# Altium PCB PCB1.PcbDoc
Units mm, origin at the board's own origin, x right, y up, seen from the top; angles counter-clockwise.
Board outline 56.95 x 49.39 mm, 2 copper layers (Top Layer, Bottom Layer); 56 components, 29 nets, 159 pads, 61 vias.
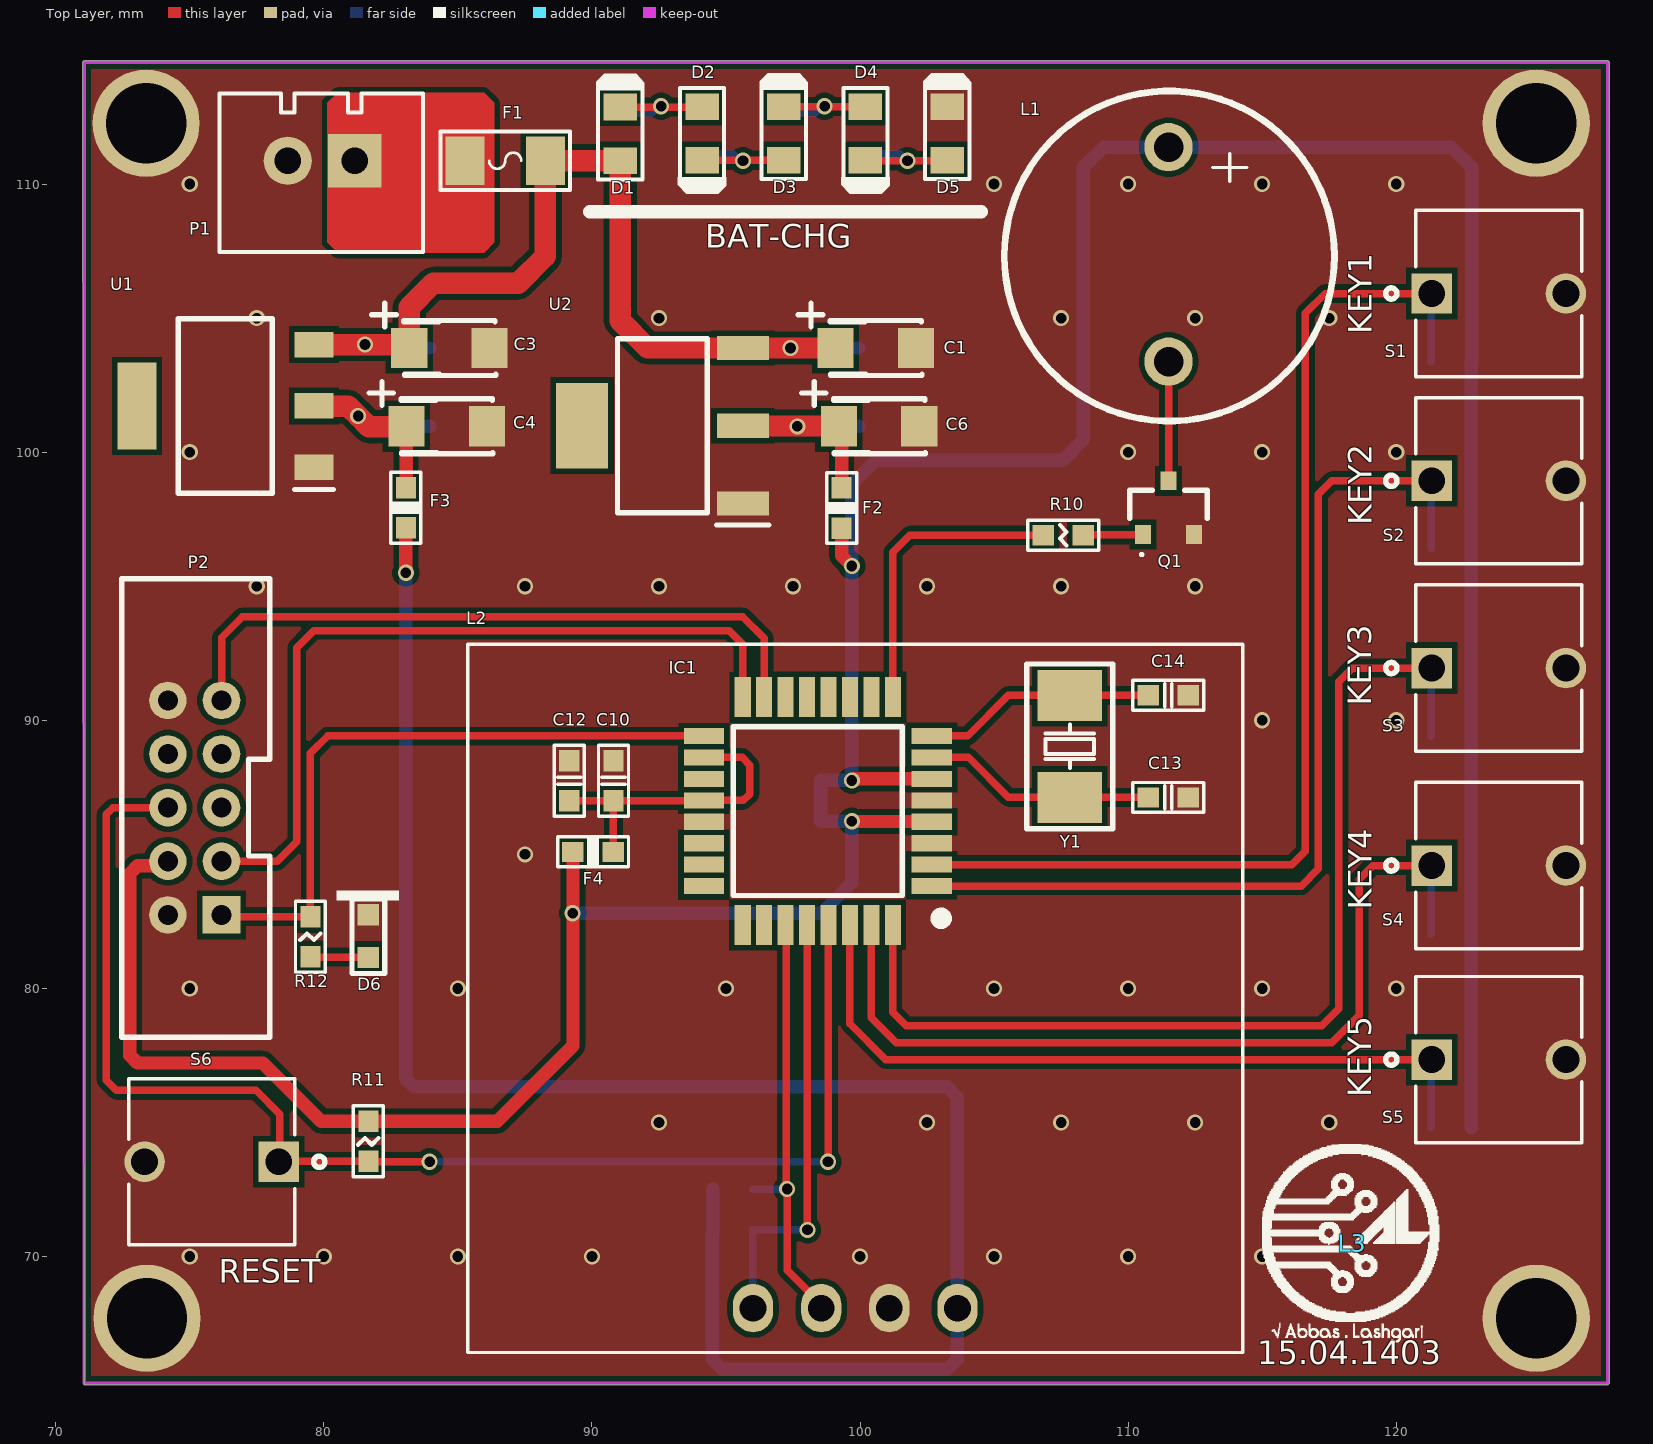
[diagram p0: Top Layer view]
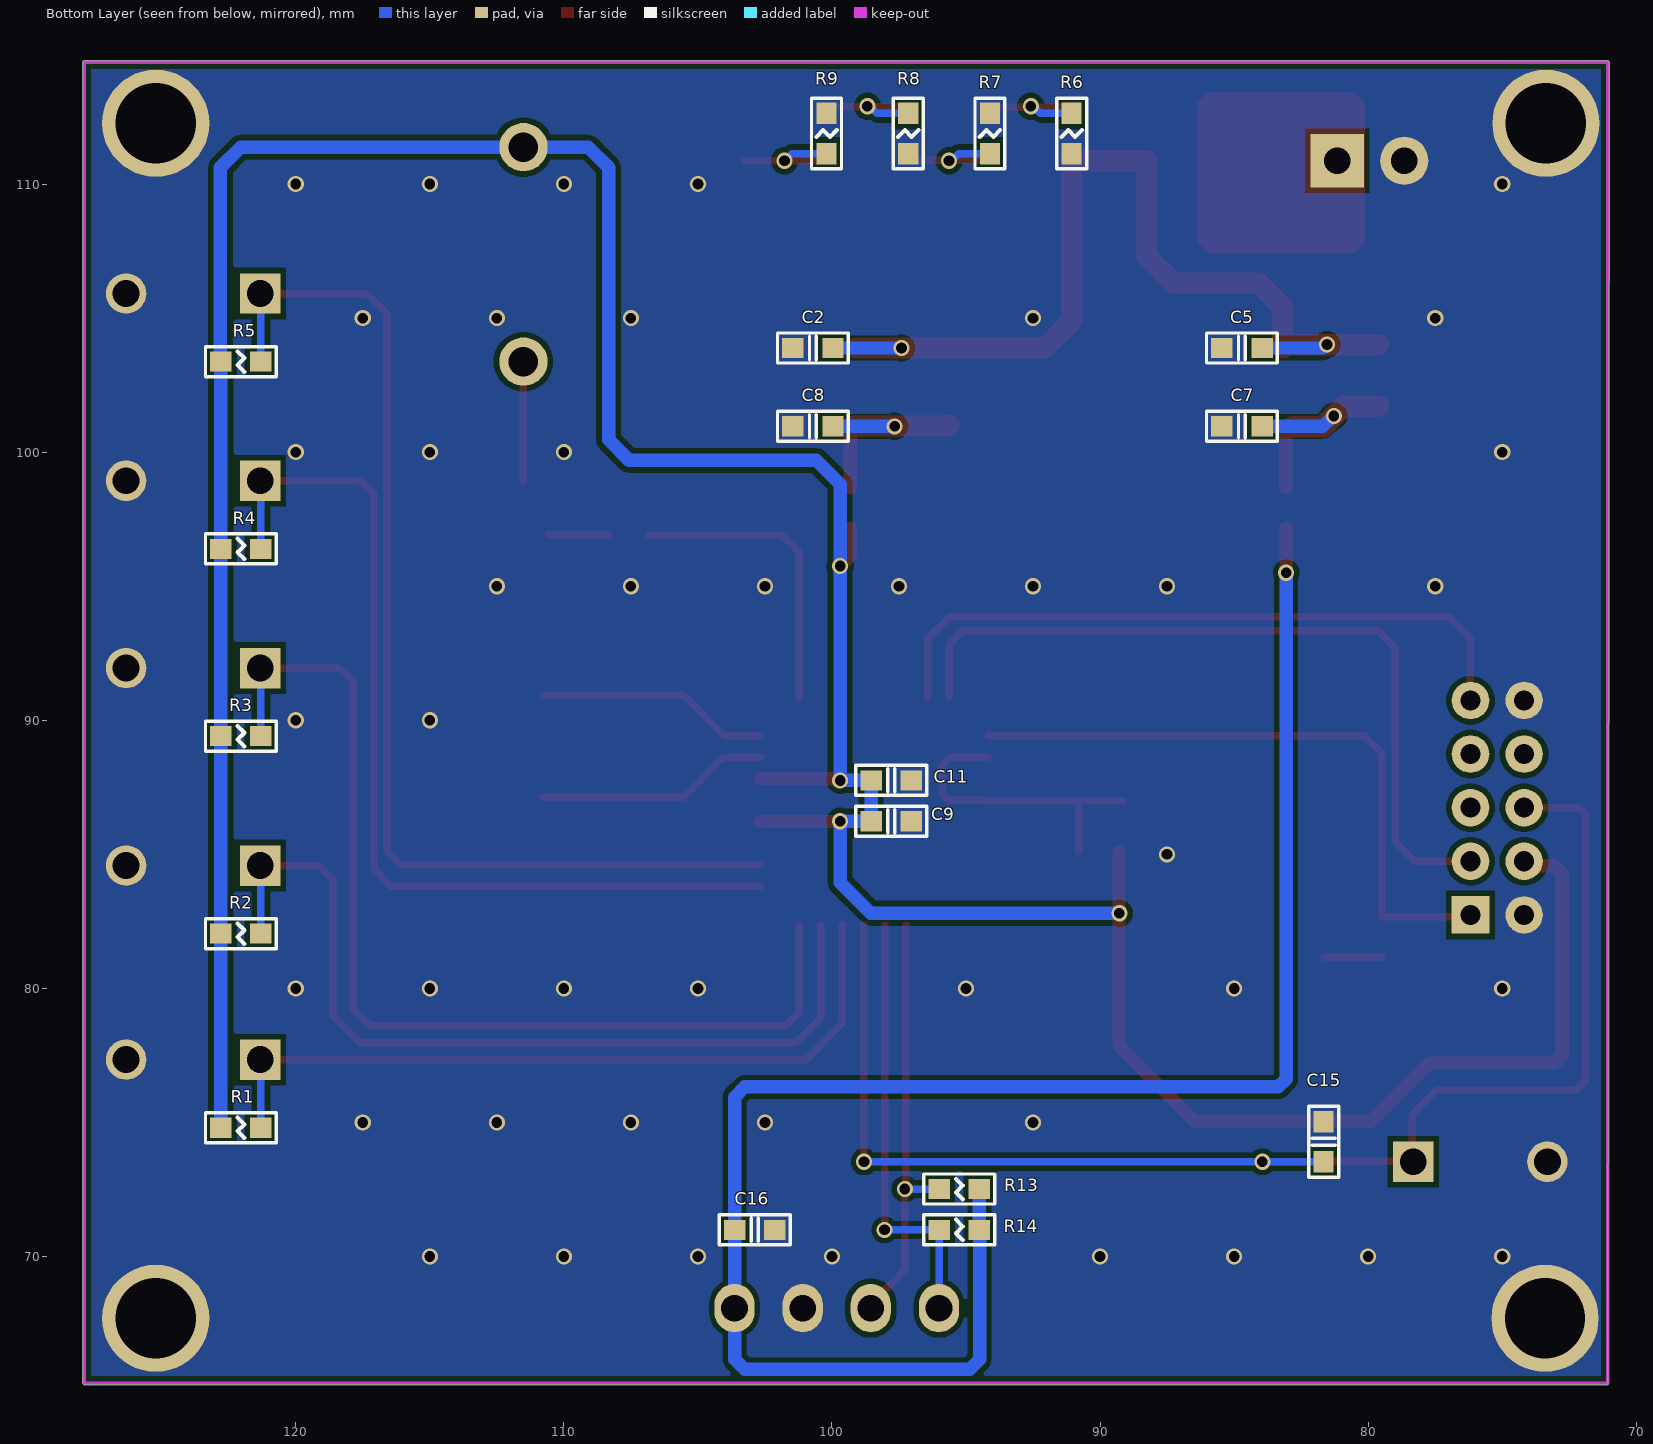
[diagram p1: Bottom Layer view, seen from below]
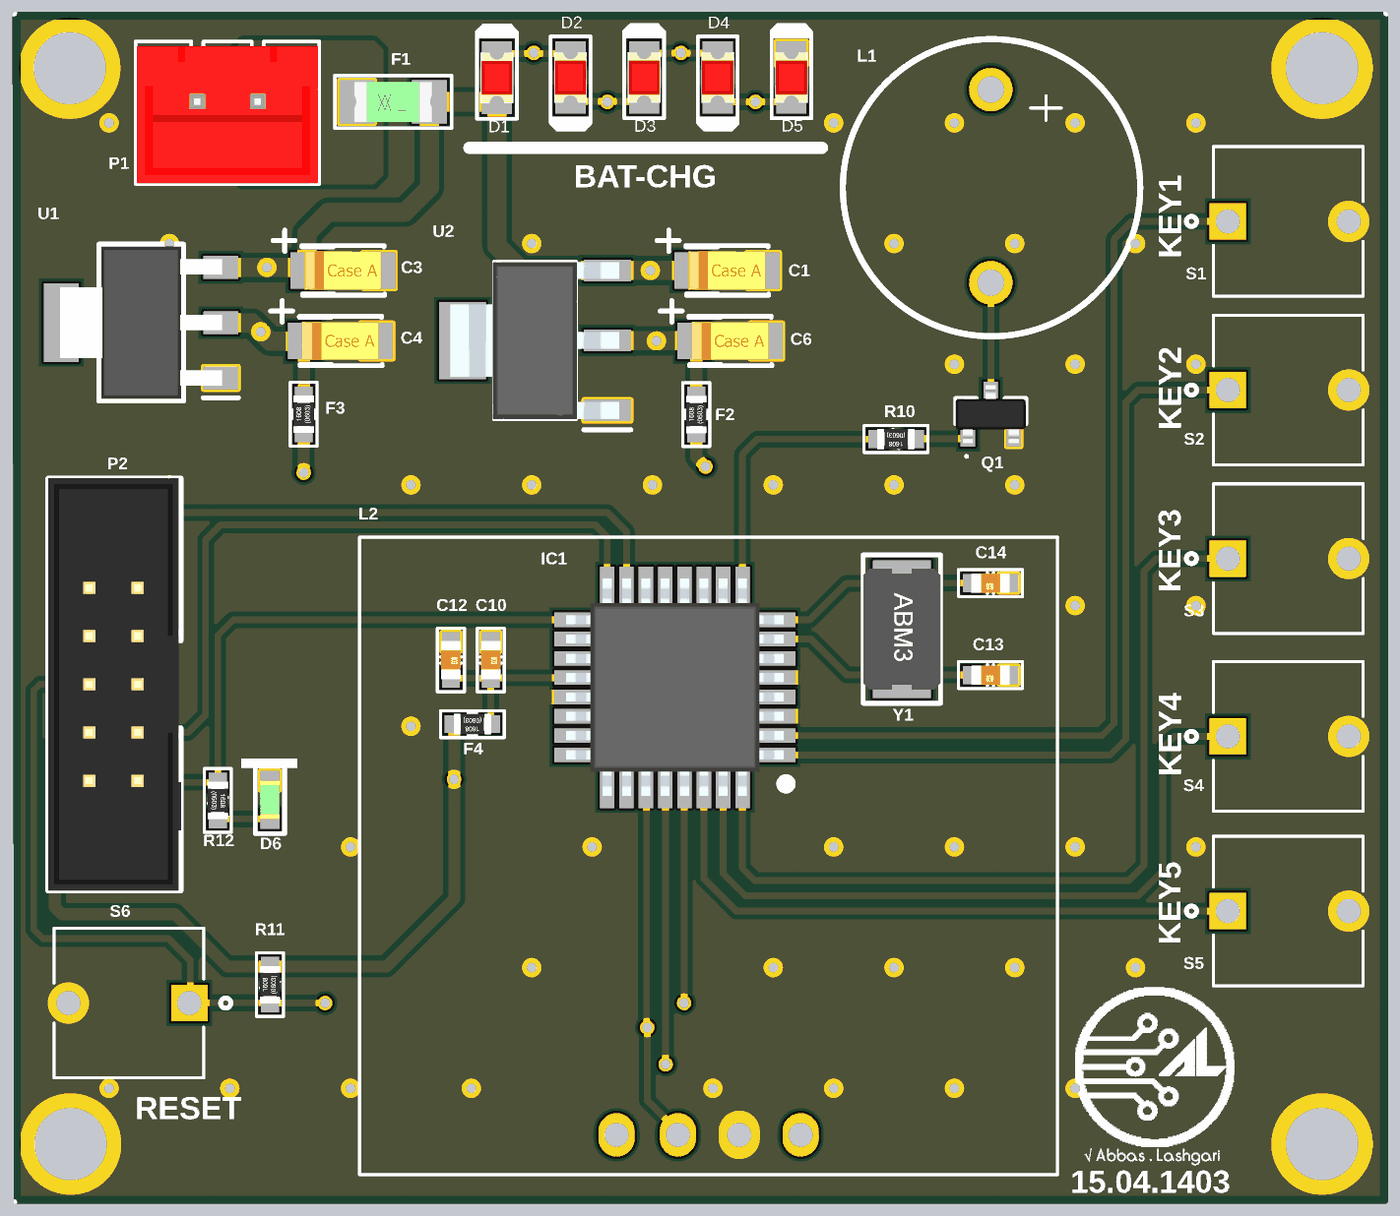
[diagram p2: 3D render of the assembled board from above, using the file's embedded part models]
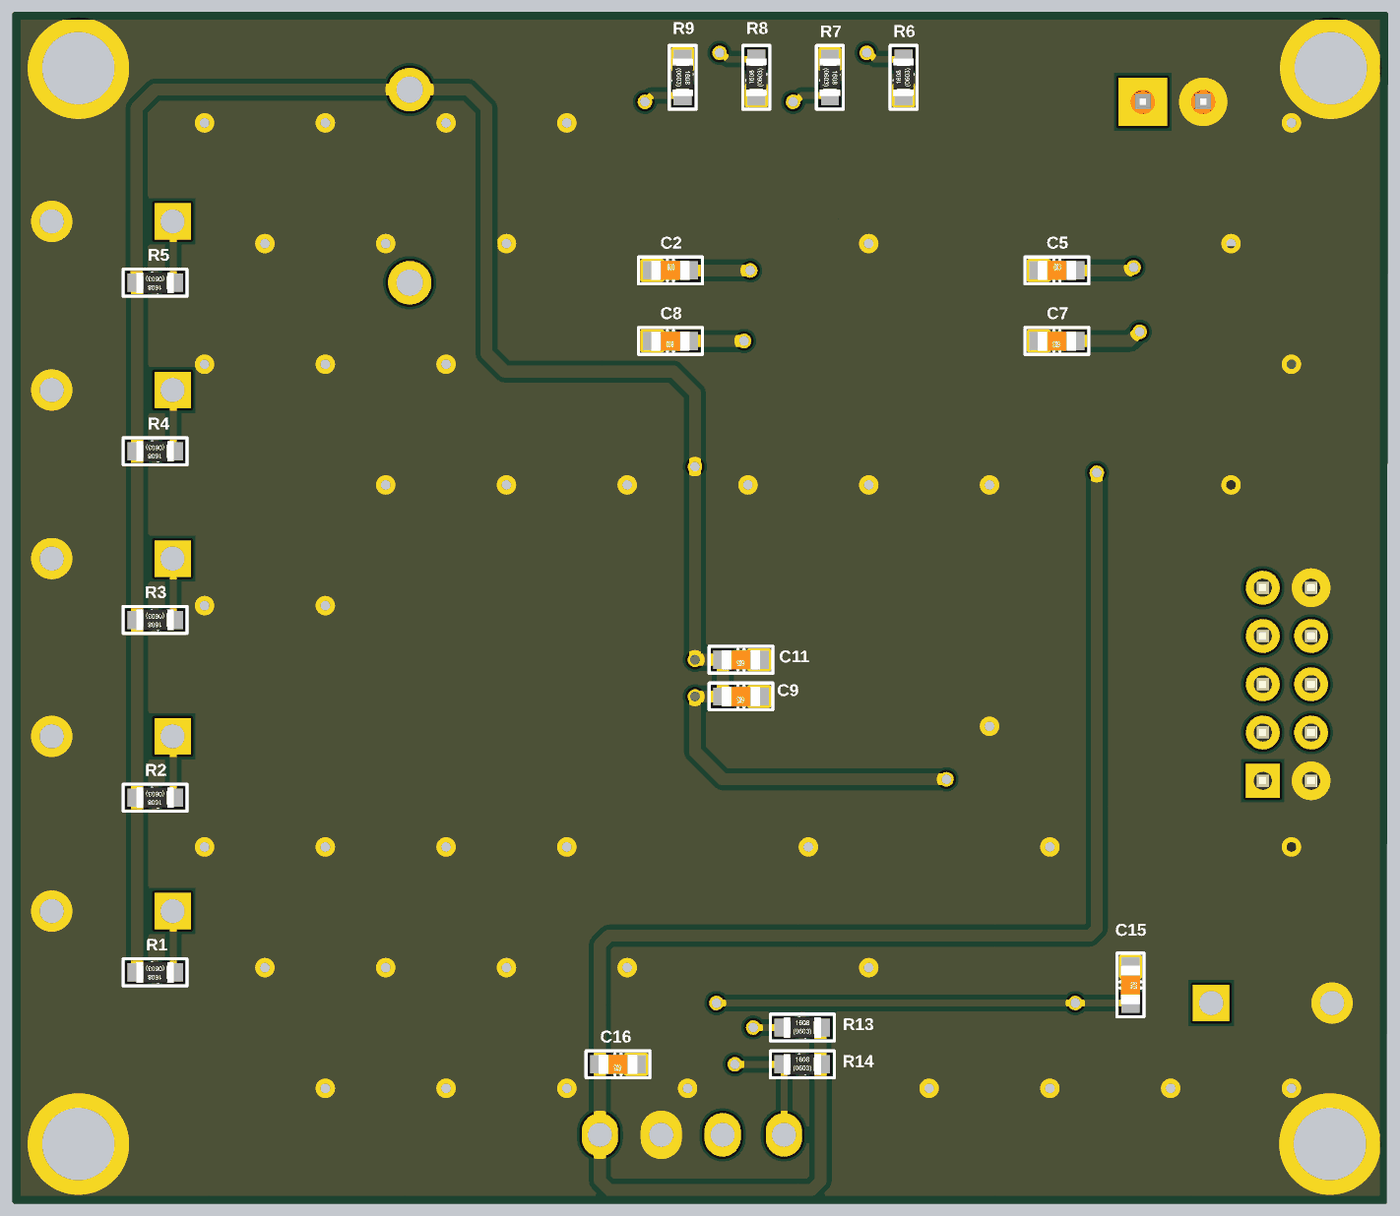
[diagram p3: 3D render of the assembled board from below, using the file's embedded part models]

## Layer stack, top to bottom
Top Solder: solder mask 0.0102, Solder Resist, Dk 3.5
Top Layer: signal copper 0.0356
Dielectric 1: dielectric 0.32, FR-4, Dk 4.8
Bottom Layer: signal copper 0.0356
Bottom Solder: solder mask 0.0102, Solder Resist, Dk 3.5

## Board outline
71.064,65.214 127.889,65.214 127.953,65.278 127.953,114.544 127.889,114.608 71.064,114.608 71,114.544

## Design rules (kind name [scope] priority, off if disabled: settings)
Clearance [All] p1: gap=0.2 ignorepadtopadclearanceinfootprint=FALSE
HoleSize [All] p1: absolutevalues=TRUE maxlimit=4 minlimit=0.025 maxpercent=80.000 minpercent=20.000
MinimumSolderMaskSliver [All] p1: minsoldermaskwidth=0.1
PolygonConnect [All] p1: connectstyle=Direct reliefconductorwidth=0.254 reliefentries=4 polygonreliefangle="90 Angle" airgapwidth=0.254
RoutingVias [All] p1: holewidth=0.3 width=0.5 viastyle="Through Hole" minholewidth=0.3 minwidth=0.5 maxholewidth=0.4 maxwidth=0.6
SilkToSilkClearance [All] p1: silktosilkclearance=0.1
SilkToSolderMaskClearance [IsPad] p1: minsilkscreentomaskgap=0 clearancetoexposedcopper=TRUE
SolderMaskExpansion [All] p1: expansion=0.102 istentingtop=FALSE
Width POW_Width [InNet('3V3') OR InNet('5V0')] p1: maxlimit=1.5 minlimit=0.5 preferedwidth=1
Width [All] p2: maxlimit=0.8 minlimit=0.28 preferedwidth=0.5
26 further rules are at their usual default settings.

## Components (designator, comment, footprint, x,y, rotation, side; value= is the part's Value field where it differs from the comment)
C1 "Cap Pol1" Tan-A 100.584,103.886 r0 top value=10uF
C2 "Cap" 603C 100.711,103.886 r180 bottom value=100nF
C3 "Cap Pol1" Tan-A 84.685,103.886 r0 top value=10uF
C4 "Cap Pol1" Tan-A 84.582,100.965 r0 top value=10uF
C5 "Cap" 603C 84.709,103.886 r180 bottom value=100nF
C6 "Cap Pol1" Tan-A 100.711,100.965 r0 top value=10uF
C7 "Cap" 603C 84.709,100.965 r0 bottom value=100nF
C8 "Cap" 603C 100.711,100.965 r0 bottom value=100nF
C9 "Cap" 603C 97.79,86.233 r0 bottom value=100nF
C10 "Cap" 603C 90.805,87.745 r270 top value=10nF
C11 "Cap" 603C 97.79,87.757 r0 bottom value=100nF
C12 "Cap" 603C 89.154,87.745 r270 top value=1uF
C13 "Cap" 603C 111.494,87.122 r180 top value=18pF
C14 "Cap" 603C 111.494,90.932 r180 top value=18pF
C15 "Cap" 603C 81.661,74.283 r270 bottom value=100pF
C16 "Cap" 603C 102.882,70.993 r0 bottom value=100nF
D1 "LED0" "LED 0805" 91.059,111.871 r90 top
D2 "LED0" "LED 0805" 94.107,111.887 r270 top
D3 "LED0" "LED 0805" 97.155,111.887 r90 top
D4 "LED0" "LED 0805" 100.203,111.887 r270 top
D5 "LED0" "LED 0805" 103.251,111.887 r90 top
D6 "LED0" "LED 0603" 81.661,81.953 r90 top
F1 "Fuse 1" "Fuse 1206" 86.765,110.871 r0 top
F2 "Ferrit" 603FB 99.314,97.917 r90 top value=1K
F3 "Ferrit" 603FB 83.058,97.929 r90 top value=1K
F4 "Ferrit" 603FB 90.043,85.09 r180 top value=1K
IC1 "ATmega328P-_15AZ" ATMEGA328P-15AZ 98.425,86.614 r180 top
L1 "KPEG-204A" KPEG204A 111.506,111.379 r0 top
L2 "OLED0.96" OLED0.96 99.822,81.534 r180 top
L3 "Logo" "Logo Abbas Lashgari" 118.364,70.485 r0 top
P1 "Battery" XH-B2B 79.903,110.871 r180 top
P2 "Progremmer" IDC-2*5 75.184,86.741 r90 top
Q1 "BC817" BC817 111.506,97.933 r0 top
R1 "Res1" 603R 122.047,74.803 r0 bottom value=10K
R2 "Res1" 603R 122.047,82.042 r0 bottom value=10K
R3 "Res1" 603R 122.047,89.408 r0 bottom value=10K
R4 "Res1" 603R 122.047,96.393 r0 bottom value=10K
R5 "Res1" 603R 122.047,103.378 r0 bottom value=10K
R6 "Res1" 603R 91.059,111.887 r90 bottom value=10K
R7 "Res1" 603R 94.107,111.887 r270 bottom value=10K
R8 "Res1" 603R 97.155,111.887 r90 bottom value=10K
R9 "Res1" 603R 100.203,111.887 r270 bottom value=10K
R10 "Res1" 603R 107.581,96.901 r180 top value=1K
R11 "Res1" 603R 81.661,74.295 r90 top value=10K
R12 "Res1" 603R 79.502,81.927 r270 top value=10K
R13 "Res1" 603R 95.25,72.517 r180 bottom value=10K
R14 "Res1" 603R 95.25,70.993 r180 bottom value=10K
S1 "SW-PB" SW_2pin 123.825,106.045 r0 top
S2 "SW-PB" SW_2pin 123.825,99.06 r0 top
S3 "SW-PB" SW_2pin 123.825,92.075 r0 top
S4 "SW-PB" SW_2pin 123.825,84.709 r0 top
S5 "SW-PB" SW_2pin 123.825,77.47 r0 top
S6 "SW-PB" SW_2pin 75.819,73.406 r180 top
U1 "AMS1117-3.3" AMS1117-3.3 76.329,101.723 r180 top
U2 "AMS1117-5.0" AMS1117-5.0 92.631,100.986 r180 top
Y1 "8MHz" ABM3 107.823,89.027 r270 top

## Footprints (in the part's own frame and the unit in brackets; to place one, negate y for a bottom-side part, rotate by r counter-clockwise, add the part's x,y. Pads: shape width x height; smd on the part's side, far side on the other; paste and mask are expansions set on the pad)
603C [mm] "1.6 mm × 0.8 mm"
  rect 0.8x0.75 smd: 1(-0.75,0) 2(0.75,0)
  silkscreen extent -1.32,-0.56 1.32,0.56, body extent -0.8,-0.4 0.8,0.4, height 0.3
603FB [mm]
  rect 0.8x0.75 smd: 1(-0.75,0) 2(0.75,0)
  silkscreen extent -1.32,-0.56 1.32,0.56, body extent -0.77,-0.42 0.78,0.43, height 0.45
603R [mm] "1.6 mm × 0.8 mm"
  rect 0.8x0.75 smd: 1(-0.75,0) 2(0.75,0)
  silkscreen extent -1.32,-0.56 1.32,0.56, body extent -0.77,-0.42 0.78,0.43, height 0.45
ABM3 [mm]
  rect 1.9x2.4 smd: 1(-1.9,0) 2(1.9,0)
  silkscreen extent -3.07,-1.6 3.07,1.6, body extent -2.5,-1.6 2.5,1.6, height 1.3
AMS1117-3.3 [mm] "LDO Voltage Regulators 3.3V"
  rect 1.45x0.95 smd: 1(-3.3,2.29) 2(-3.3,0) 3(-3.3,-2.29)
  rect 1.45x3.25 smd: 4(3.3,0)
  silkscreen extent -4.03,-3.25 1.75,3.25, body extent -3.35,-3.15 3.35,3.15, height 1.8
AMS1117-5.0 [mm] "LDO Voltage Regulators 5.0V"
  rect 1.95x0.9 smd: 1(-3,2.9) 2(-3,0) 3(-3,-2.9)
  rect 1.95x3.2 smd: 4(3,0)
  silkscreen extent -3.98,-3.25 1.68,3.7, body extent -3.5,-3.25 3.5,3.25, height 1.8
ATMEGA328P-15AZ [mm] "AVR AVR® ATmega Microcontroller IC 8-Bit 16MHz 32KB (16K x 16) FLASH 32-TQFP (7x7)"
  rect 1.5x0.6 smd: 1(-4.25,2.8) 2(-4.25,2) 3(-4.25,1.2) 4(-4.25,0.4) 5(-4.25,-0.4) 6(-4.25,-1.2) 7(-4.25,-2) 8(-4.25,-2.8) 17(4.25,-2.8) 18(4.25,-2) 19(4.25,-1.2) 20(4.25,-0.4) 21(4.25,0.4) 22(4.25,1.2) 23(4.25,2) 24(4.25,2.8)
  rect 0.6x1.5 smd: 9(-2.8,-4.25) 10(-2,-4.25) 11(-1.2,-4.25) 12(-0.4,-4.25) 13(0.4,-4.25) 14(1.2,-4.25) 15(2,-4.25) 16(2.8,-4.25) 25(2.8,4.25) 26(2,4.25) 27(1.2,4.25) 28(0.4,4.25) 29(-0.4,4.25) 30(-1.2,4.25) 31(-2,4.25) 32(-2.8,4.25)
  silkscreen extent -4.8,-3.15 3.15,4.2, body extent -4.5,-4.5 4.5,4.5, height 1.2
BC817 [mm] "45 V, 500 mA NPN general-purpose transistors"
  rect 0.6x0.7 smd: 1(-0.95,-1) 2(0.95,-1) 3(0,1)
  silkscreen extent -1.45,-1.8 1.45,0.65, body extent -1.45,-1.2 1.45,1.2, height 0.95
"Fuse 1206" [mm] "Body 3.2mm x 1.6mm"
  rect 1.45x1.8 smd: 1(-1.5,0) 2(1.5,0)
  silkscreen extent -2.41,-1.09 2.41,1.09, body extent -1.6,-0.83 1.6,0.83, height 0.56
IDC-2*5 [mm] "10 Pin IDC, 2.0mm Pitch"
  rect 1.4x1.4 hole 0.75: 1(-4,-1)
  round 1.4 hole 0.75: 2(-4,1) 3(-2,-1) 4(-2,1) 5(0,-1) 6(0,1) 7(2,-1) 8(2,1) 9(4,-1) 10(4,1)
  silkscreen extent -8.56,-2.79 8.53,2.72, body extent -8.55,-2.8 8.55,2.7, height 5.6
KPEG204A [mm]
  round 1.8 hole 1.1: 1(0,0) 2(0,-8.001)
  silkscreen extent -6.13,-10.22 6.19,2.09, body extent -6,-10.06 6,1.94, height 9.5
"LED 0603" [mm]
  rect 0.8x0.8 smd: 1(-0.8,0) 2(0.8,0)
  silkscreen extent -1.4,-1.14 1.7,1.19, body extent -0.8,-0.4 0.8,0.4, height 0.85
"LED 0805" [mm] "Body 1.25mm x 2mm"
  rect 1x1.25 smd: 1(-1,0) 2(1,0)
  silkscreen extent -1.7,-0.9 2.24,0.9, body extent -1.05,-0.67 1.05,0.68, height 0.9
"Logo Abbas Lashgari" [mm] "Logo"
  silkscreen extent -3.36,-3.67 3.23,3.7
OLED0.96 [mm] "OLED 0.96 I2C"
  oval 1.5x1.8 hole 1: 1(-3.81,13.462) 2(-1.27,13.462) 3(3.81,13.462) 4(1.27,13.462)
  silkscreen extent -14.45,-11.3 14.45,15.11, body extent -14.35,-11.18 14.35,14.99, height 2.8
SW_2pin [mil] "Push Button 2pin Dip"
  rect 59.37x59.37 hole 39.37: 1(-98.5,-5)
  round 59.37 hole 39.37: 2(98.5,-5)
  silkscreen extent -166,-127 122,117, body extent -112,-125 113,115, height 142
Tan-A [mm] "Tantalium Size A - 3.2mm x 1.6mm"
  rect 1.35x1.5 smd: 1(-1.5,0) 2(1.5,0)
  silkscreen extent -2.9,-1.03 1.73,1.67, body extent -1.6,-0.8 1.6,0.8, height 1.6
XH-B2B [mm] "2 Pin XH Male Connector, 2.5mm Pitch"
  rect 2x2 hole 1: 1(-1.25,0)
  round 1.8 hole 1: 2(1.25,0)
  silkscreen extent -3.8,-2.5 3.8,3.4, body extent -3.75,-2.31 3.75,3.39, height 7

## Part data
C1 C3 C4 C6: "Polarized Capacitor (Radial)", LatestRevisionDate=17-Jul-2002, LatestRevisionNote="Re-released for DXP Platform.", PackageDescription="Polarized Capacitor (Radial); 2 Leads", PackageReference=RB7.6-15, Published=8-Jun-2000, Publisher="Altium Limited"
C2 C5 C7 C8 C9 C10 C11 C12 C13 C14 C15 C16: "Capacitor", LatestRevisionDate=17-Jul-2002, LatestRevisionNote="Re-released for DXP Platform.", PackageDescription="Radial Cap, Thru-Hole; 2 Leads; 0.3 in Pin Spacing", PackageReference=RAD-0.3, Published=8-Jun-2000, Publisher="Altium Limited"
D1 D2 D3 D4 D5 D6: "Typical INFRARED GaAs LED", LatestRevisionDate=08-Jul-2005, LatestRevisionNote="Mech Layer 1 removed.", PackageDescription="LED; 2 Leads", PackageReference=LED-0, Published=8-Jun-2000, Publisher="Altium Limited"
F1: "Fuse", LatestRevisionDate=17-Jul-2002, LatestRevisionNote="Re-released for DXP Platform.", PackageDescription="Thru-Hole; 2 Leads", PackageReference=PIN-W2/E2.8, Published=8-Jun-2000, Publisher="Altium Limited"
F2 F3 F4: library part Res2, "Resistor", LatestRevisionDate=17-Jul-2002, LatestRevisionNote="Re-released for DXP Platform.", PackageDescription="Axial Device, Thru-Hole; 2 Leads; 0.4 in Pin Spacing", PackageReference=AXIAL-0.4, Published=8-Jun-2000, Publisher="Altium Limited"
IC1: library part ATmega328P_15AZ, "AVR AVR® ATmega Microcontroller IC 8-Bit 16MHz 32KB (16K x 16) FLASH 32-TQFP (7x7)", Manufacturer_Name=Microchip, Manufacturer_Part_Number="ATmega328P- 15AZ", Mouser Part Number=N/A, Datasheet Link=https://ww1.microchip.com/downloads/en/DeviceDoc/Atmel-7810-Automotive-Microcontrollers-ATmega328P_Datasheet.pdf, Height=1.2mm, Mouser Price/Stock=https://www.mouser.com/Search/Refine.aspx?Keyword=N%2FA
L1: "Piezo Buzzers & Audio Indicators buzzer, 12 mm x 9.5 mm deep, M, 5 V, 85 dB, Through Hole, Audio Indicator", Manufacturer_Name=KINGSTATE, Datasheet Link=http://www.farnell.com/datasheets/16476.pdf, Height=16.5mm, Manufacturer_Part_Number=KPEG-204A
L2: "OLED 0.96 I2C"
L3: "Abbas Lashgari Logo"
P1: library part "Header 2", "Header, 2-Pin", LatestRevisionDate=17-Jul-2002, LatestRevisionNote="Re-released for DXP Platform.", Publisher="Altium Limited"
P2: library part "Header 5X2", "Header, 5-Pin, Dual row", LatestRevisionDate=17-Jul-2002, LatestRevisionNote="Re-released for DXP Platform.", Publisher="Altium Limited"
Q1: "45 V, 500 mA NPN general-purpose transistors"
R1 R2 R3 R4 R5 R6 R7 R8 R9 R10 R11 R12 R13 R14: "Resistor", LatestRevisionDate=17-Jul-2002, LatestRevisionNote="Re-released for DXP Platform.", PackageDescription="Axial Device, Thru-Hole; 2 Leads; 0.3 in Pin Spacing", PackageReference=AXIAL-0.3, Published=8-Jun-2000, Publisher="Altium Limited"
S1 S2 S3 S4 S5 S6: "Switch", LatestRevisionDate=17-Jul-2002, LatestRevisionNote="Re-released for DXP Platform.", PackageDescription="Switch; 2 Leads", PackageReference=SPST-2, Published=24-Mar-1999, Publisher="Altium Limited"
U1: "LDO Voltage Regulators 3.3V", Manufacturer_Name=Advanced, Datasheet Link=https://datasheet.datasheetarchive.com/originals/distributors/Datasheets-28/DSA-550594.pdf, Height=1.8mm, Manufacturer_Part_Number=AMS1117-3.3
U2: "LDO Voltage Regulators 5.0V", Manufacturer_Name=Shikues, Datasheet Link=https://datasheet.lcsc.com/szlcsc/SK-AMS1117-5-0_C165483.pdf, Height=1.8mm, Manufacturer_Part_Number=AMS1117-5.0
Y1: library part XTAL, "Crystal Oscillator", LatestRevisionDate=17-Jul-2002, LatestRevisionNote="Re-released for DXP Platform.", PackageDescription="Crystal, Thru-Hole; 2 Leads; Body 3.1 x 8.2 mm (Dia.xH)", PackageReference=R38, Published=8-Jun-2000, Publisher="Altium Limited"

## Free pads (board coordinates)
  round 4 hole 3: 0(73.37,112.268) 0(73.406,67.691) 0(125.222,67.691) 0(125.222,112.268)

## Via types
v1: diameter 0.6, hole 0.4, Top Layer to Bottom Layer, 61 vias

## Nets (pads, with @x,y where several pads share a name; then routed paths per layer and width w, separated by ;. In a path a pad name is that pad's centre, name@x,y a point inside that pad or via, vN(x,y) a via of type N, cw(c..) or ccw(c..) an arc to the next point about the centre after c; other vN are vias at no path point)
3V3: C16.2 F3.1 L2.1 R13.2 R14.2 | length 67
  Top Layer w0.5: v1(83.058,95.504) F3.1
  Bottom Layer w0.5: v1(83.058,95.504) 83.058,76.62 83.351,76.327 103.251,76.327 103.632,75.946 103.632,66.172 103.251,65.791 94.864,65.791 94.493,66.162 94.493,70.868 94.5,70.874 R13.2
5V0: C9.2 C11.2 F2.1 F4.2 IC1.4 IC1.6 L1.1 P2.4 R1.2 R2.2 R3.2 R4.2 R5.2 R11.2 | length 140.4
  Top Layer w0.5: P2.4 74.012,84.569 73.051,84.569 72.758,84.276 72.758,77.509 73.051,77.216 77.724,77.216 79.895,75.045 R11.2 86.475,75.045 89.293,77.863 F4.2 ; F2.1 99.314,96.139 v1(99.695,95.758) ; v1(99.695,86.233) 99.704,86.224 102.665,86.224 IC1.4 ; v1(99.695,87.757) 99.722,87.757 99.779,87.814 IC1.6
  Bottom Layer w0.5: v1(89.281,82.804) 98.552,82.804 99.695,83.947 v1(99.695,86.233) C9.2 C11.2 v1(99.695,87.757) v1(99.695,95.758) 99.695,98.806 100.584,99.695 107.569,99.695 108.331,100.457 108.331,110.617 109.093,111.379 L1.1 122.047,111.379 122.809,110.617 R5.2@122.809,103.378 ; R1.2 R2.2 R3.2 R4.2 R5.2
Buzzer: IC1.9 R10.2 | length 11.3
  Top Layer w0.28: IC1.9 101.225,96.272 101.854,96.901 R10.2
GND: C1.2 C2.1 C3.2 C4.2 C5.1 C6.2 C7.2 C8.2 C9.1 C10.1 C11.1 C12.1 C13.1 C14.1 C15.1 C16.1 D5.2 D6.2 IC1.3 IC1.5 IC1.21 L2.2 P1.2 P2.2 P2.10 pad.0 Q1.2 R6.1 R7.1 R8.1 R9.1 S1.2 S2.2 S3.2 S4.2 S5.2 S6.2 U1.1 U2.1
  other v1: 75,70 80,70 85,70 90,70 100,70 105,70 110,70 115,70 92.5,75 102.5,75 107.5,75 112.5,75 117.5,75 75,80 85,80 95,80 105,80 110,80 115,80 120,80 87.5,85 115,90 120,90 77.5,95 87.5,95 92.5,95 97.5,95 102.5,95 107.5,95 112.5,95 75,100 110,100 115,100 120,100 77.5,105 92.5,105 107.5,105 112.5,105 117.5,105 75,110 105,110 110,110 115,110 120,110
Key1: IC1.2 R5.1 S1.1 | length 41.8
  Top Layer w0.28: IC1.2 116.11,84.614 116.614,85.118 116.614,105.184 117.348,105.918 S1.1
  Bottom Layer w0.28: R5.1 121.285,103.378 121.297,103.39 121.297,105.892 S1.1
Key2: IC1.1 R4.1 S2.1 | length 35.6
  Top Layer w0.28: IC1.1 116.453,83.814 117.094,84.455 117.094,98.425 117.602,98.933 S2.1
  Bottom Layer w0.28: R4.1 121.297,98.907 S2.1
Key3: IC1.32 R3.1 S3.1 | length 38.8
  Top Layer w0.28: IC1.32 101.225,79.115 101.727,78.613 117.221,78.613 117.856,79.248 117.856,91.44 118.364,91.948 S3.1
  Bottom Layer w0.28: R3.1 121.297,91.922 S3.1
Key4: IC1.31 R2.1 S4.1 | length 33
  Top Layer w0.28: IC1.31 100.425,78.899 101.346,77.978 117.602,77.978 118.618,78.994 118.618,84.074 119.126,84.582 S4.1
  Bottom Layer w0.28: R2.1 121.285,82.042 121.297,82.054 121.297,84.556 S4.1
Key5: IC1.30 R1.1 S5.1 | length 28.5
  Top Layer w0.28: IC1.30 99.625,78.683 100.965,77.343 S5.1
  Bottom Layer w0.28: R1.1 121.297,77.317 S5.1
MISO: IC1.16 P2.3 | length 29.4
  Top Layer w0.28: P2.3 78.264,84.741 78.994,85.471 78.994,92.71 79.629,93.345 95.123,93.345 95.625,92.843 IC1.16
MOSI: IC1.15 P2.9 | length 25.4
  Top Layer w0.28: P2.9 76.184,93.075 76.962,93.853 95.631,93.853 96.425,93.059 IC1.15
NetC4_1: C4.1 C7.1 F3.2 U1.2 | length 8.6
  Top Layer w0.5: F3.2 83.07,98.691 83.07,100.929 C4.1@83.058,100.941
  Top Layer w0.8: U1.2 79.641,101.711 80.915,101.711 v1(81.28,101.346) 81.676,100.95 C4.1@82.807,100.95
  Bottom Layer w0.5: v1(81.28,101.346) 81.307,101.346 81.688,100.965 C7.1
NetC6_1: C6.1 C8.1 F2.2 U2.2 | length 8.2
  Top Layer w0.5: C6.1 99.314,100.862 F2.2
  Top Layer w0.8: U2.2 95.642,100.976 97.663,100.976 99.201,100.976 C6.1
  Bottom Layer w0.5: v1(97.663,100.965) C8.1
NetD1_2: D1.2 D2.1 R6.2 | length 4.7
  Top Layer w0.28: D1.2 D2.1@94.091,112.871 ; D2.1@94.107,112.871 D2.1@94.091,112.871 ; D2.1 D2.1@94.091,112.871
  Bottom Layer w0.28: R6.2 92.23,112.637 92.496,112.903 v1(92.583,112.903)
NetD2_2: D2.2 D3.1 R7.2 | length 4.7
  Top Layer w0.28: D2.2 D3.1
  Bottom Layer w0.28: R7.2 95.278,111.137 95.544,110.871 v1(95.631,110.871)
NetD3_2: D3.2 D4.1 R8.2 | length 4.7
  Top Layer w0.28: D3.2 D4.1
  Bottom Layer w0.28: R8.2 98.326,112.637 98.592,112.903 v1(98.679,112.903)
NetD4_2: D4.2 D5.1 R9.2 | length 4.7
  Top Layer w0.28: D4.2 100.219,110.871 103.235,110.871 D5.1
  Bottom Layer w0.28: R9.2 101.501,111.137 v1(101.767,110.871)
NetD6_1: D6.1 R12.2 | length 2.2
  Top Layer w0.28: R12.2 79.514,81.165 81.649,81.165 D6.1
NetF1_1: F1.1 P1.1
NetL1_2: L1.2 Q1.3 | length 4.4
  Top Layer w0.28: Q1.3 L1.2
NetQ1_1: Q1.1 R10.1 | length 2.2
  Top Layer w0.28: R10.1 108.347,96.917 110.54,96.917 Q1.1
OLED_SCL: IC1.28 L2.3 R14.1 | length 16.3
  Top Layer w0.28: IC1.28 98.035,82.355 98.035,71.002 v1(98.044,70.993)
  Bottom Layer w0.28: L2.3 96.006,68.078 96.006,70.987 R14.1 v1(98.044,70.993)
OLED_SDA: IC1.27 L2.4 R13.1 | length 16.1
  Top Layer w0.28: IC1.27 97.254,82.335 97.254,72.545 v1(97.282,72.517) 97.282,69.492 98.552,68.222 L2.4
  Bottom Layer w0.28: R13.1 v1(97.282,72.517)
RST: C15.2 IC1.29 P2.6 R11.1 S6.1 | length 52.7
  Top Layer w0.28: P2.6 72.136,86.741 71.882,86.487 71.882,76.581 72.263,76.2 77.47,76.2 78.359,75.311 78.359,73.571 S6.1@78.333,73.545 ; S6.1 S6.1@78.333,73.545 ; v1(83.947,73.533) 83.941,73.539 81.667,73.539 R11.1 S6.1@78.333,73.545 ; v1(98.806,73.533) 98.815,73.542 98.815,82.355 IC1.29
  Bottom Layer w0.28: C15.2 v1(83.947,73.533) v1(98.806,73.533)
SCK: IC1.17 P2.1 R12.1 | length 24.4
  Top Layer w0.28: P2.1 76.248,82.677 R12.1 79.502,88.773 80.143,89.414 IC1.17
VBAT: C1.1 C2.2 C3.1 C5.2 D1.1 F1.2 U1.3 U2.3 | length 36.8
  Top Layer w0.8: U1.3 v1(81.534,104.013) 83.058,104.013 C3.1 83.185,105.41 84.074,106.299 87.249,106.299 88.265,107.315 F1.2 D1.1 91.059,104.902 92.075,103.886 U2.3 v1(97.409,103.886) C1.1
  Bottom Layer w0.5: v1(81.534,104.013) 81.561,104.013 81.688,103.886 C5.2 ; v1(97.409,103.886) C2.2
VDDA: C10.2 C12.2 F4.1 IC1.18 IC1.20 | length 11.7
  Top Layer w0.28: C12.2 C10.2 ; F4.1 90.799,85.096 90.799,86.989 C10.2 ; IC1.18 95.599,88.614 95.885,88.328 95.885,87.249 95.65,87.014 IC1.20 94.166,87.004 90.814,87.004 C10.2
Xtal1: C13.2 IC1.7 Y1.2 | length 8.7
  Top Layer w0.28: IC1.7 104.045,88.614 105.532,87.127 Y1.2 ; Y1.2@107.828,87.122 C13.2
Xtal2: C14.2 IC1.8 Y1.1 | length 8.7
  Top Layer w0.28: IC1.8 104.019,89.414 105.532,90.927 Y1.1 ; Y1.1@107.828,90.932 C14.2
pads on no net: IC1.10 IC1.11 IC1.12 IC1.13 IC1.14 IC1.19 IC1.22 IC1.23 IC1.24 IC1.25 IC1.26 P2.5 P2.7 P2.8 U1.4 U2.4

## Polygon pours and split planes (outlines as drawn)
GND on Top Layer "NONET_L-01_P-001" (solid, pour order 0): 71.12,114.554 127.889,114.554 127.889,65.278 71.12,65.278
GND on Bottom Layer "NONET_L-01_P-001" (solid, pour order 1): 127.953,114.554 127.953,65.278 70.993,65.278 70.993,114.554

## Keep-outs
Keep-Out Layer:
  lines w0.127: 71.064,65.278 71.064,114.544 127.889,114.544 127.889,65.278 71.064,65.278

## Other copper
Top Layer:
  region net NetF1_1: 80.137,107.823 80.518,107.442 85.979,107.442 86.36,107.823 86.36,113.03 85.979,113.411 80.518,113.411 80.137,113.03

## Silkscreen, mask and mechanical layers (free items; w line width, h text height)
Top Overlay:
  lines w0.5: 89.916,108.966 104.521,108.966
  text "BAT-CHG" at 94.234,107.333 h1.5
  text "KEY1" at 119.38,104.394 h1.5 r90
  text "KEY2" at 119.38,97.282 h1.5 r90
  text "KEY3" at 119.362,90.551 h1.5 r90
  text "KEY4" at 119.38,82.931 h1.5 r90
  text "KEY5" at 119.362,75.946 h1.5 r90
  text "RESET" at 76.073,68.725 h1.5
  text "15.04.1403" at 114.808,65.677 h1.5

## Dimensions
71.064,114.544 to 71.064,65.278 on Top Overlay
71.064,114.544 to 127.889,114.544 on Top Overlay